# Altium PCB PCB1.PcbDoc
Units mil, origin at the board's own origin, x right, y up, seen from the top; angles counter-clockwise.
Board outline 1512.03 x 712.03 mil, 2 copper layers (Top Layer, Bottom Layer); 9 components, 5 nets, 22 pads, 3 vias.
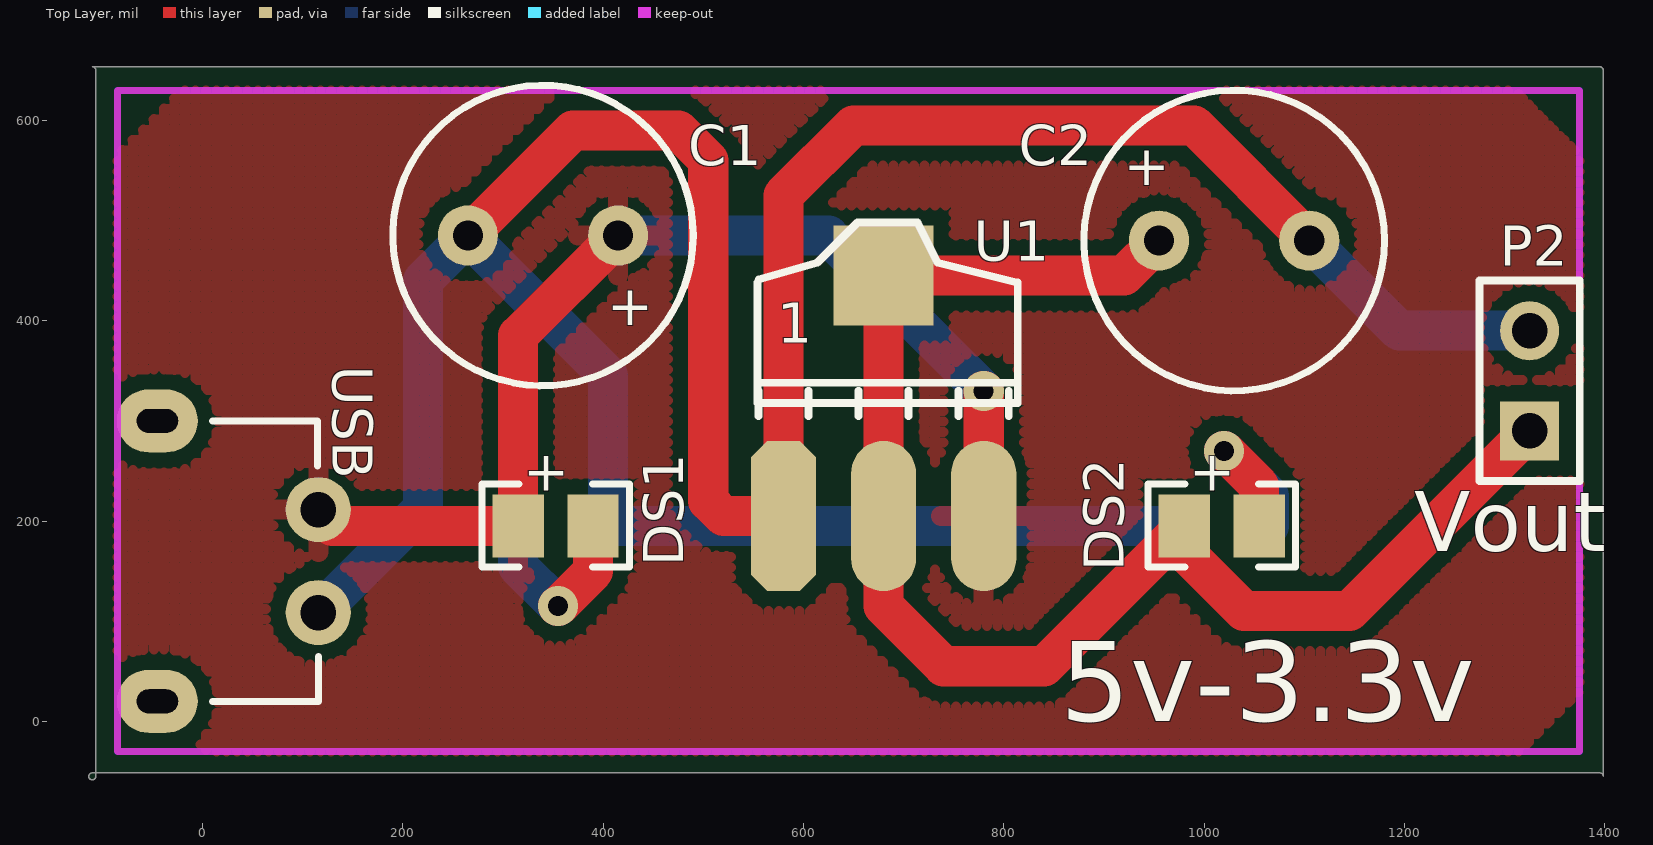
[diagram p0: Top Layer view]
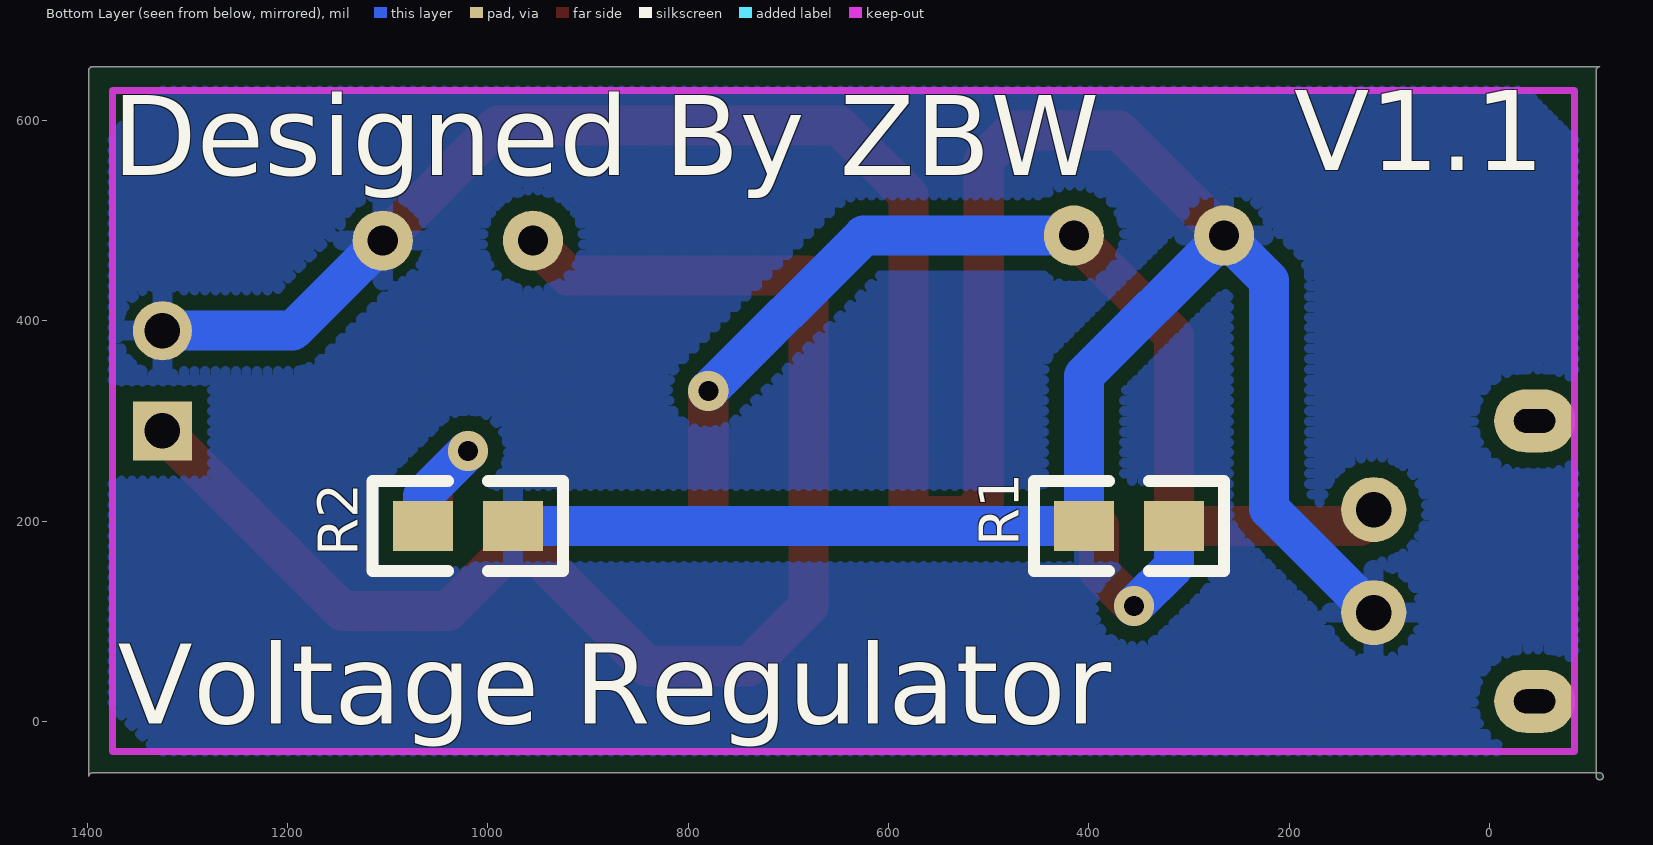
[diagram p1: Bottom Layer view, seen from below]

## Layer stack, top to bottom
Top Solder: solder mask 0.4, Solder Resist, Dk 3.5
Top Layer: signal copper 1.4
Dielectric 1: dielectric 12.6, FR-4, Dk 4.8
Bottom Layer: signal copper 1.4
Bottom Solder: solder mask 0.4, Solder Resist, Dk 3.5

## Board outline
-113.52,-55 ccw(c-110,-55) -110,-58.52 ccw(c-110,-55) -106.48,-55 -106.48,650 ccw(c-110,650) -110,653.51 1395,653.51 cw(c1395,650) 1398.52,650 1398.52,-55 ccw(c1395,-55) 1395,-51.48 -110,-51.48 ccw(c-110,-55)

## Design rules (kind name [scope] priority, off if disabled: settings)
Clearance Clearance_poly [InPolygon] p1: gap=15 ignorepadtopadclearanceinfootprint=TRUE
Clearance Clearance_via [IsVia vs ispad] p2: gap=6 ignorepadtopadclearanceinfootprint=TRUE
Clearance [All] p3: gap=10 ignorepadtopadclearanceinfootprint=TRUE
PolygonConnect PolygonConnect_via [isvia] p1: connectstyle=Direct reliefconductorwidth=10 reliefentries=4 polygonreliefangle="90 Angle" airgapwidth=10
PolygonConnect [All] p2: connectstyle=Relief reliefconductorwidth=20 reliefentries=4 polygonreliefangle="90 Angle" airgapwidth=10
RoutingVias [All] p1: holewidth=12 width=24 viastyle="Through Hole" minholewidth=10 minwidth=18 maxholewidth=20 maxwidth=40
SilkToSilkClearance [All] p1 off: silktosilkclearance=10
SilkToSolderMaskClearance [IsPad] p1 off: minsilkscreentomaskgap=10 clearancetoexposedcopper=TRUE
SolderMaskExpansion [All] p1: expansion=4
Width [All] p1: maxlimit=40 minlimit=10 preferedwidth=20 minimp=50.000000 maximp=50.000000 favimp=50.000000
28 further rules are at their usual default settings.

## Components (designator, comment, footprint, x,y, rotation, side; value= is the part's Value field where it differs from the comment)
C1 "Cap Pol1" RB.15/.3 415,485 r180 top value=220uF
C2 "Cap Pol1" RB.15/.3 955,480 r0 top value=220uF
DS1 "LED1" LED0805 315.2,195 r0 top
DS2 "LED1" LED0805 980.2,195 r0 top
P2 "Header 2" HDR1X2 1325,290 r90 top
R1 "200" 0805 405,195.13 r180 bottom
R2 "200" 0805 975,195 r0 bottom
U1 "AMS1117-3.3" AMS1117 579.97,205.06 r0 top
USB "USB" DIP-2p -45,299.92 r270 top (schematic designator USB1)

## Footprints (in the part's own frame and the unit in brackets; to place one, negate y for a bottom-side part, rotate by r counter-clockwise, add the part's x,y. Pads: shape width x height; smd on the part's side, far side on the other; paste and mask are expansions set on the pad)
0805 [mil]
  rect 60x50 smd: 1(0,-0.06) 2(90,-0.06)
  silkscreen extent -50,-45 140,45
AMS1117 [mil]
  oct 65x150 smd: 1(0.03,-0.06)
  oval 65x150 smd: 2(100.03,-0.06) 3(200.03,-0.06)
  rect 100x100 smd: 4(100.03,239.94)
  silkscreen extent -26,100 234,293
DIP-2p [mm] "DIP-2p"
  round 1.651 hole 0.9: 1(2.25,4.08) 5(4.86,4.08)
  oval 1.6x2.05 hole 1.05 slot 0.6 at 0 deg: 3(0,0) 4(7.11,0)
  silkscreen extent 0,1.4 7.11,4.08
HDR1X2 [mm] "Connector; Header; 2 Position"
  rect 1.5x1.5 hole 0.9: 1(0,0)
  round 1.5 hole 0.9: 2(2.54,0)
  silkscreen extent -1.27,-1.27 3.81,1.27
LED0805 [mm]
  rect 1.3x1.6 smd: 1(0,0) 2(1.9,0)
  silkscreen extent -0.91,-1.04 2.82,1.07
RB.15/.3 [mil] "电解电容"
  round 60 hole 30: 1(0,0) 2(150,0)
  silkscreen extent -75,-150 225,150

## Part data
C1 C2: "Polarized Capacitor (Radial)", LatestRevisionDate=17-Jul-2002, LatestRevisionNote="Re-released for DXP Platform.", PackageDescription="Polarized Capacitor (Radial); 2 Leads", PackageReference=RB7.6-15, Published=8-Jun-2000, Publisher="Altium Limited"
DS1 DS2: library part LED2, "Typical RED, GREEN, YELLOW, AMBER GaAs LED", PackageDocument=Feb-2002, LatestRevisionDate=17-Jul-2002, LatestRevisionNote="Re-released for DXP Platform.", PackageReference=3.2X1.6X1.1, Published=8-Jun-2000, Publisher="Altium Limited"
P2: "Header, 2-Pin", LatestRevisionDate=17-Jul-2002, LatestRevisionNote="Re-released for DXP Platform.", Publisher="Altium Limited"
R1 R2: library part R
U1: library part AMS1117
USB: library part USB5

## Via types
v1: diameter 40, hole 20, Top Layer to Bottom Layer, tented both sides, 3 vias

## Nets (pads, with @x,y where several pads share a name; then routed paths per layer and width w, separated by ;. In a path a pad name is that pad's centre, name@x,y a point inside that pad or via, vN(x,y) a via of type N, cw(c..) or ccw(c..) an arc to the next point about the centre after c; other vN are vias at no path point)
5v: C1.1 DS1.1 U1.3 USB.1 | length 1092
  Top Layer w40: USB.1@115,210 130,195 DS1.1 315.2,385.2 C1.1 ; U1.3 v1(780,330)
  Bottom Layer w40: C1.1 625,485 v1(780,330)
GND: C1.2 C2.2 P2.2 R1.1 R2.1 U1.1 USB.5 | length 3253.9
  Top Layer w40: C1.2 370,590 475,590 505,560 505,220 520,205 U1.1 580,525 650,595 990,595 C2.2
  Bottom Layer w40: USB.5@115,107.24 220,212.24 220,440 C1.2 405,345 R1.1 R2.1 ; C2.2 1195,390 P2.2
NetC2_1: C2.1 DS2.1 P2.1 U1.2 U1.4 | length 1471.9
  Top Layer w40: C2.1 920,445 U1.4 U1.2 680,115 740,55 840.2,55 DS2.1 980.2,169.8 1040,110 1145,110 P2.1
NetDS1_2: DS1.2 R1.2 | length 191.1
  Top Layer w40: v1(355,115) 390,150 DS1.2
  Bottom Layer w40: R1.2 315,155 v1(355,115)
NetDS2_2: DS2.2 R2.2 | length 183.1
  Top Layer w40: v1(1020,270) 1055,235 DS2.2
  Bottom Layer w40: v1(1020,270) 1065,225 R2.2
pads on no net: USB.3 USB.4

## Polygon pours and split planes (outlines as drawn)
5v on Top Layer (hatched 90Degree grid 10.4 track 10, remove dead copper, pour order 8): -85,565 -20,630 1310,630 1375,565 1375,30 1315,-30 5,-30 -85,60
GND on Bottom Layer (hatched 90Degree grid 10.4 track 10, remove dead copper, pour order 10): -85,580 -35,630 1330,630 1375,585 1375,15 1330,-30 -20,-30 -85,35

## Keep-outs
Keep-Out Layer:
  lines w7: -85,-30 -85,630 1375,630 1375,-30 -85,-30

## Silkscreen, mask and mechanical layers (free items; w line width, h text height)
Top Overlay:
  text "Vout" at 1210,170 h60
  text "5v-3.3v" at 856.2,0 h80
Bottom Overlay:
  text "V1.1" at 195,550 h80
  text "Designed By ZBW" at 1375,545 h80
  text "Voltage Regulator" at 1369.4,-2.2 h80
Mechanical 1:
  lines w7: -110,-55 1335,-55 1395,-55 1395,0 1395,650 -110,650 -110,-55

## Text inside footprints (layer, text, board x,y; h text height)
C1: Top Overlay "+" at 450,430 h40 r180
C2: Top Overlay "+" at 920,535 h40
DS1: Top Overlay "+" at 320.2,230 h40
DS2: Top Overlay "+" at 985.2,230 h40
U1: Top Overlay "1" at 574,378 h40